# Altium PCB AD.PcbDoc
Units mm, origin at the board's own origin, x right, y up, seen from the top; angles counter-clockwise.
Board outline 105 x 72 mm, 2 copper layers (Top Layer, Bottom Layer); 130 components, 113 nets, 400 pads, 34 vias.
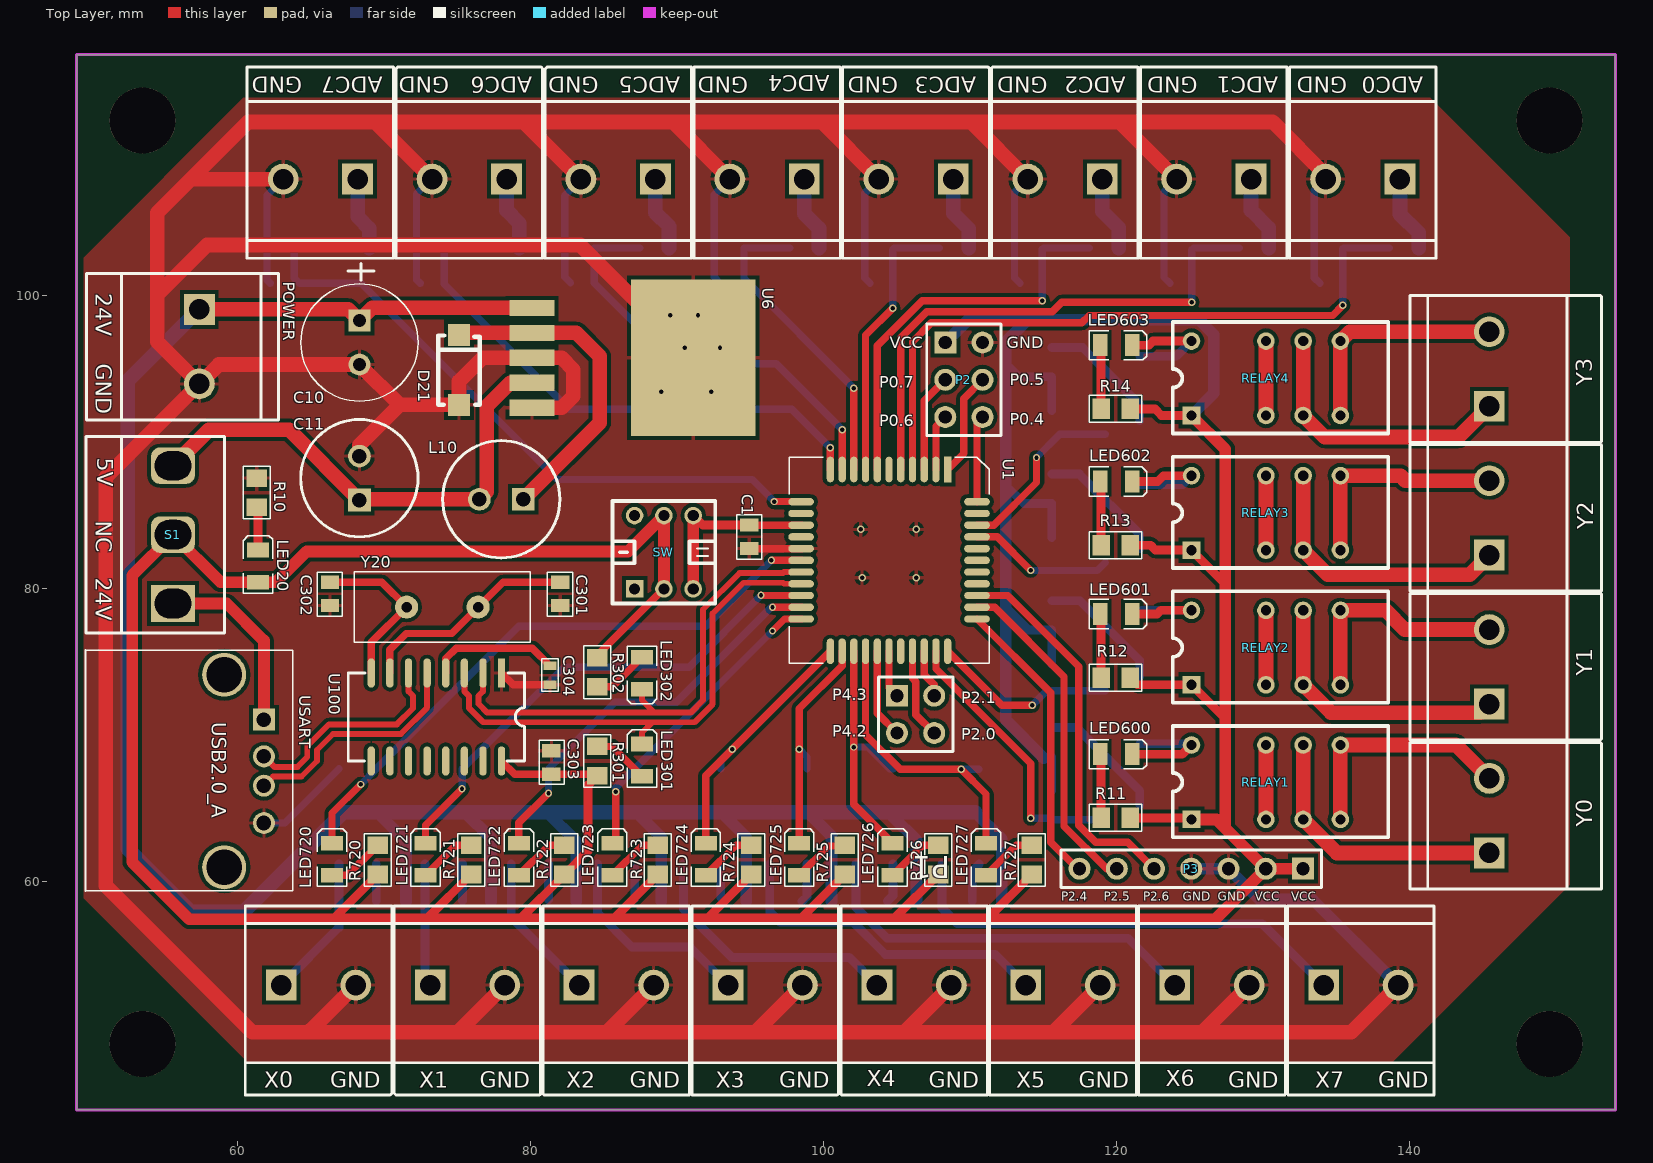
[diagram p0: Top Layer view]
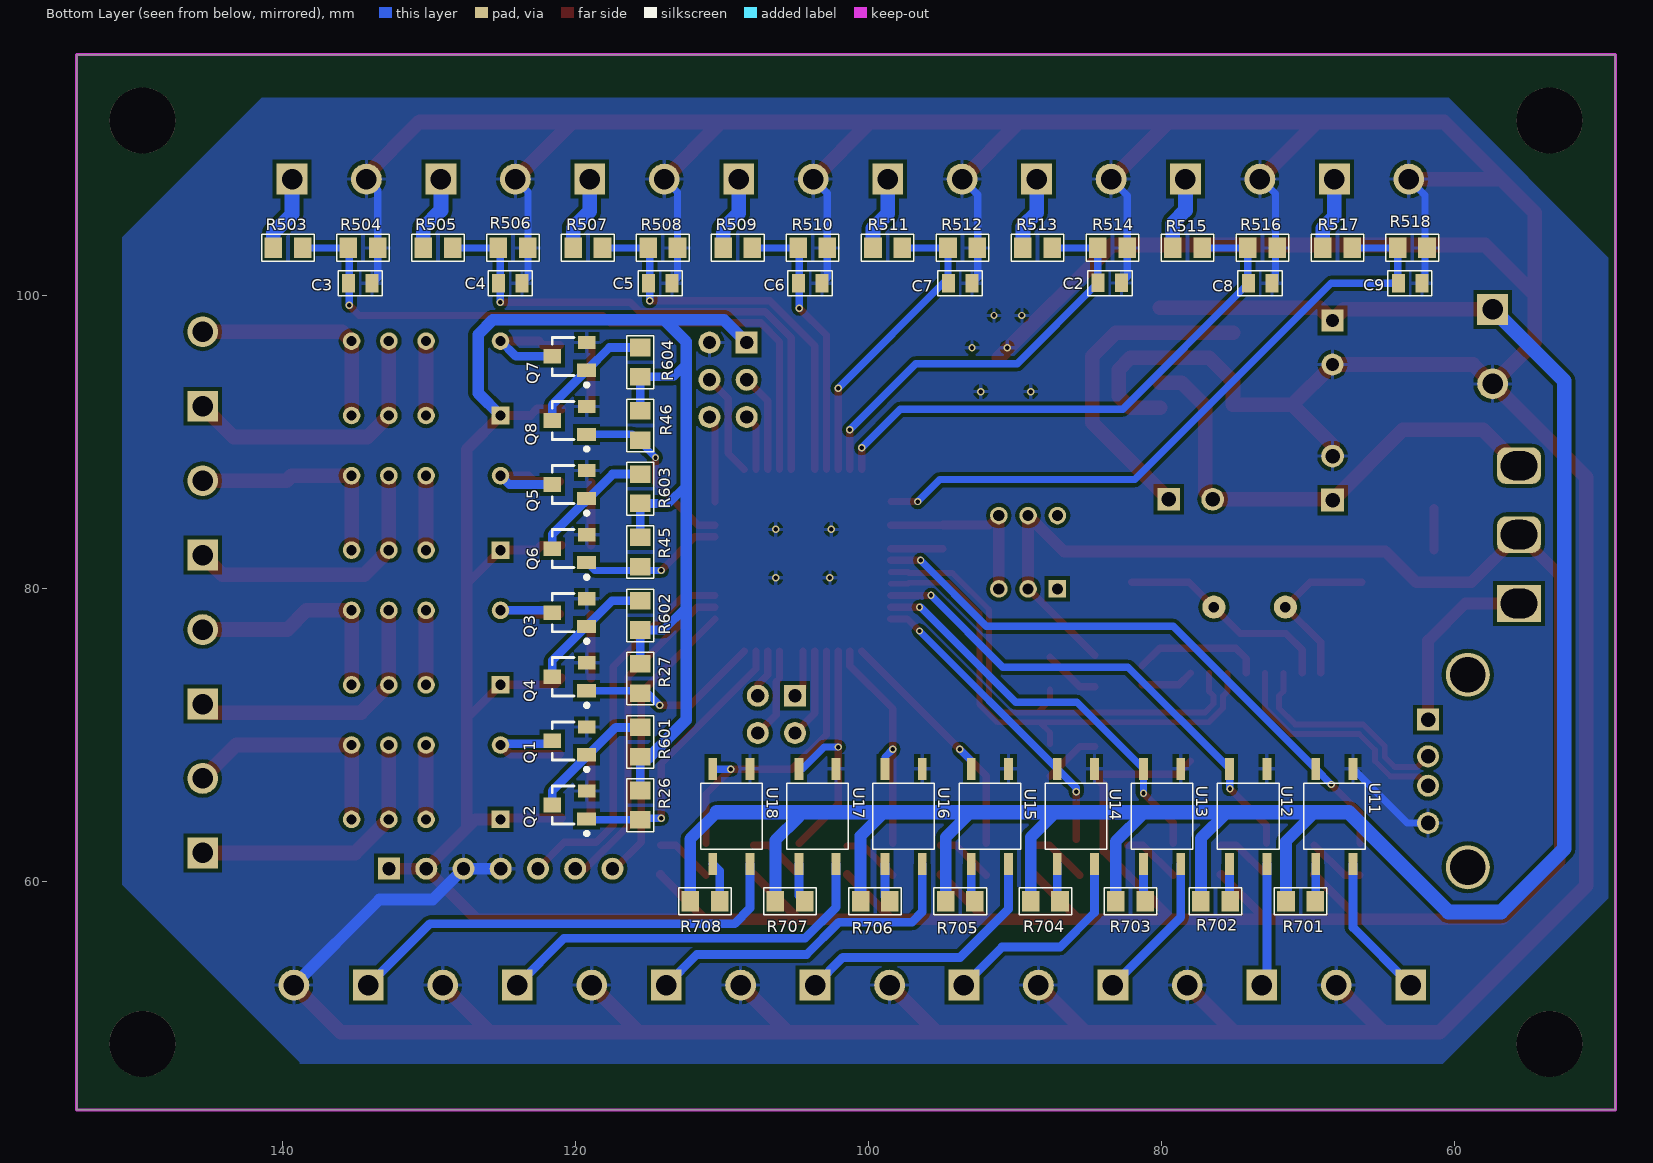
[diagram p1: Bottom Layer view, seen from below]

## Layer stack, top to bottom
Top Layer: signal copper 0.0356
Dielectric: dielectric 0.32, FR-4, Dk 4.8
Bottom Layer: signal copper 0.0356

## Board outline
49.022,116.45 49.022,44.45 154.022,44.45 154.022,116.45

## Design rules (kind name [scope] priority, off if disabled: settings)
Clearance [All] p1: gap=0.254
DiffPairsRouting DiffPair_DDiffPairsRouting [InDifferentialPair ('D')] p1: maxlimit=0.254 minlimit=0.254 mostfreqgap=0.254 maxuncoupledlength=12.7
DiffPairsRouting DiffPair_RXTXDiffPairsRouting [InDifferentialPair ('RXTX')] p2: maxlimit=0.254 minlimit=0.254 mostfreqgap=0.254 maxuncoupledlength=12.7
DiffPairsRouting [All] p3: maxlimit=0.254 minlimit=0.254 mostfreqgap=0.254 maxuncoupledlength=12.7
MatchedLengths DiffPair_DMatchedLengths [InDifferentialPair ('D')] p1: tolerance=0.1 checknetsindiffpair=TRUE checkdiffpairvsdiffpair=TRUE checkothers=TRUE
MatchedLengths DiffPair_RXTXMatchedLengths [InDifferentialPair ('RXTX')] p2: tolerance=0.1 checknetsindiffpair=TRUE checkdiffpairvsdiffpair=TRUE checkothers=TRUE
PolygonConnect [All] p1: connectstyle=Relief reliefconductorwidth=0.254 reliefentries=4 polygonreliefangle="90 Angle"
RoutingVias [All] p1: holewidth=0.711 width=1.27 viastyle="Through Hole" minholewidth=0.711 minwidth=1.27 maxholewidth=0.711 maxwidth=1.27
SilkscreenOverComponentPads [All] p1: minsilkscreentomaskgap=0.254
SolderMaskExpansion [All] p1: expansion=0.102
TestPointUsage [All] p1: valid=0 allowmultiple=FALSE
Testpoint [All] p1: side=15 testpointundercomponent=TRUE minsize=1.016 maxsize=2.54 preferedsize=1.524 minholesize=0 maxholesize=1.016 preferedholesize=0.813 testpointgrid=0.025 style=1023 order=0-112345678
Width DiffPair_DWidth [InDifferentialPair('D')] p1: maxlimit=0.4 minlimit=0.4 preferedwidth=0.4
Width DiffPair_RXTXWidth [InDifferentialPair('RXTX')] p2: maxlimit=0.4 minlimit=0.4 preferedwidth=0.4
Width [All] p3: maxlimit=0.254 minlimit=0.254 preferedwidth=0.254
22 further rules are at their usual default settings.

## Components (designator, comment, footprint, x,y, rotation, side; value= is the part's Value field where it differs from the comment)
ADC0 "ADC" CON2_1 139.319,107.95 r180 top
ADC1 "ADC" CON2_1 129.159,107.95 r180 top
ADC2 "ADC" CON2_1 118.999,107.95 r180 top
ADC3 "ADC" CON2_1 108.839,107.95 r180 top
ADC4 "ADC" CON2_1 98.679,107.95 r180 top
ADC5 "ADC" CON2_1 88.519,107.95 r180 top
ADC6 "ADC" CON2_1 78.359,107.95 r180 top
ADC7 "ADC" CON2_1 68.199,107.95 r180 top
C1 "104" C-0805 94.922,84.35 r270 top
C2 "104" C-0805 84.325,100.868 r180 bottom
C3 "104" C-0805 133.858,100.838 r0 bottom
C4 "104" C-0805 123.625,100.838 r0 bottom
C5 "104" C-0805 113.393,100.838 r0 bottom
C6 "104" C-0805 103.16,100.838 r0 bottom
C7 "104" C-0805 92.928,100.838 r0 bottom
C8 "104" C-0805 72.463,100.838 r0 bottom
C9 "104" C-0805 62.23,100.838 r0 bottom
C10 "35V/100UF" RB 68.326,98.298 r0 top
C11 "35V/1000UF" L-DIP 68.322,86.05 r180 top
C301 "22pF" C-0805 82.022,80.45 r270 top
C302 "22pF" C-0805 66.322,80.45 r270 top
C303 "10uF" C-0805 81.422,67.35 r90 top
C304 "0.01uf" C-0603 81.322,73.45 r90 top
D21 "IN5822 /SS310" DO-214AC 75.122,92.55 r90 top
L10 "100uH" L-DIP 79.502,86.106 r270 top
LED20 "LED-RED" led-0805 61.402,80.45 r90 top
LED301 "" LED-0805 87.606,67.21 r90 top
LED302 "" LED-0805 87.606,75.338 r270 top
LED600 "" LED-0805 118.864,68.712 r0 top
LED601 "" LED-0805 118.864,78.269 r0 top
LED602 "" LED-0805 118.864,87.317 r0 top
LED603 "" LED-0805 118.864,96.62 r0 top
LED720 "LED" LED-0805 66.456,60.446 r90 top
LED721 "LED" LED-0805 72.83,60.446 r90 top
LED722 "LED" LED-0805 79.205,60.446 r90 top
LED723 "LED" LED-0805 85.579,60.446 r90 top
LED724 "LED" LED-0805 91.954,60.446 r90 top
LED725 "LED" LED-0805 98.328,60.446 r90 top
LED726 "LED" LED-0805 104.702,60.446 r90 top
LED727 "LED" LED-0805 111.077,60.446 r90 top
P1 "Header 2X2" HDR2X2 105,72.7 r270 top
P2 "Header 3X2" HDR2X3 108.3,96.8 r270 top
P3 "Header 7" HDR1X7 132.7,60.9 r180 top
POWER "Power Input" CON2_1 57.404,99.06 r270 top
Q1 "2N2222" SOT23A 120.388,69.623 r90 bottom
Q2 "2N2222" SOT23A 120.388,65.251 r90 bottom
Q3 "2N2222" SOT23A 120.388,78.368 r90 bottom
Q4 "2N2222" SOT23A 120.388,73.996 r90 bottom
Q5 "2N2222" SOT23A 120.388,87.113 r90 bottom
Q6 "2N2222" SOT23A 120.388,82.741 r90 bottom
Q7 "2N2222" SOT23A 120.388,95.858 r90 bottom
Q8 "2N2222" SOT23A 120.388,91.486 r90 bottom
R10 "10K" R0805 61.322,87.55 r270 top
R11 "10K" R0805 118.924,64.362 r0 top
R12 "10K" R0805 118.924,73.919 r0 top
R13 "10K" R0805 118.924,82.967 r0 top
R14 "10K" R0805 118.924,92.27 r0 top
R26 "2K" R0805 115.562,64.235 r90 bottom
R27 "2K" R0805 115.562,72.871 r90 bottom
R45 "2K" R0805 115.562,81.507 r90 bottom
R46 "2K" R0805 115.562,90.143 r90 bottom
R301 "10K" R0805 84.558,69.242 r270 top
R302 "10K" R0805 84.558,73.306 r90 top
R503 "10K" R0805 140.589,103.251 r180 bottom
R504 "10K" R0805 135.475,103.251 r180 bottom
R505 "10K" R0805 130.361,103.251 r180 bottom
R506 "10K" R0805 125.247,103.251 r180 bottom
R507 "10K" R0805 120.134,103.251 r180 bottom
R508 "10K" R0805 115.02,103.251 r180 bottom
R509 "10K" R0805 109.906,103.251 r180 bottom
R510 "10K" R0805 104.792,103.251 r180 bottom
R511 "10K" R0805 99.678,103.251 r180 bottom
R512 "10K" R0805 94.564,103.251 r180 bottom
R513 "10K" R0805 89.45,103.251 r180 bottom
R514 "10K" R0805 84.336,103.251 r180 bottom
R515 "10K" R0805 79.223,103.251 r180 bottom
R516 "10K" R0805 74.109,103.251 r180 bottom
R517 "10K" R0805 68.995,103.251 r180 bottom
R518 "10K" R0805 63.881,103.251 r180 bottom
R601 "1K" R0805 115.562,70.543 r270 bottom
R602 "1K" R0805 115.562,77.189 r90 bottom
R603 "1K" R0805 115.562,85.825 r90 bottom
R604 "1K" R0805 115.562,94.461 r90 bottom
R701 "2K" R0805 71.501,58.674 r180 bottom
R702 "2K" R0805 77.307,58.674 r180 bottom
R703 "2K" R0805 83.112,58.674 r180 bottom
R704 "2K" R0805 88.918,58.674 r180 bottom
R705 "2K" R0805 94.724,58.674 r180 bottom
R706 "2K" R0805 100.53,58.674 r180 bottom
R707 "2K" R0805 106.335,58.674 r180 bottom
R708 "2K" R0805 112.141,58.674 r180 bottom
R720 "10K" R0805 69.563,60.506 r90 top
R721 "10K" R0805 75.938,60.506 r90 top
R722 "10K" R0805 82.312,60.506 r90 top
R723 "10K" R0805 88.686,60.506 r90 top
R724 "10K" R0805 95.061,60.506 r90 top
R725 "10K" R0805 101.435,60.506 r90 top
R726 "10K" R0805 107.81,60.506 r90 top
R727 "10K" R0805 114.184,60.506 r90 top
RELAY1 "G6S-2" G6S-2 130.175,66.802 r270 top
RELAY2 "G6S-2" G6S-2 130.175,75.988 r270 top
RELAY3 "G6S-2" G6S-2 130.175,85.175 r270 top
RELAY4 "G6S-2" G6S-2 130.175,94.361 r270 top
S1 "SW-SPDT_2" SW_1 55.604,78.994 r90 top
SW "SW" SW 85.598,78.994 r0 top
U1 "STC15F2K60S2_QFP44" PQFP44 108.458,88.138 r270 top
U6 "LM2576" LM2576 85.598,95.758 r0 top
U11 "EL357" el357 69.469,61.214 r90 bottom
U12 "EL357" EL357 75.347,61.214 r90 bottom
U13 "EL357" EL357 81.226,61.214 r90 bottom
U14 "EL357" EL357 87.104,61.214 r90 bottom
U15 "EL357" EL357 92.982,61.214 r90 bottom
U16 "EL357" EL357 98.86,61.214 r90 bottom
U17 "EL357" EL357 104.739,61.214 r90 bottom
U18 "EL357" EL357 110.617,61.214 r90 bottom
U100 "CH340G" CH340G 78.022,74.25 r270 top
USART "USB" USB2.0_A 60.452,67.564 r180 top
X0 "XH2.54" con2_1 62.992,52.959 r0 top
X1 "XH2.54" con2_1 73.152,52.959 r0 top
X2 "XH2.54" con2_1 83.312,52.959 r0 top
X3 "XH2.54" con2_1 93.472,52.959 r0 top
X4 "XH2.54" con2_1 103.632,52.959 r0 top
X5 "XH2.54" con2_1 113.792,52.959 r0 top
X6 "XH2.54" con2_1 123.952,52.959 r0 top
X7 "XH2.54" con2_1 134.112,52.959 r0 top
Y0 "Header 2" CON2_1 145.415,61.976 r90 top
Y1 "Header 2" CON2_1 145.415,72.136 r90 top
Y2 "Header 2" CON2_1 145.415,82.296 r90 top
Y3 "Header 2" CON2_1 145.415,92.456 r90 top
Y20 "12MHz" XTAL1 76.422,78.75 r180 top

## Footprints (in the part's own frame and the unit in brackets; to place one, negate y for a bottom-side part, rotate by r counter-clockwise, add the part's x,y. Pads: shape width x height; smd on the part's side, far side on the other; paste and mask are expansions set on the pad)
C-0603 [mm] "SMT 1.6*0.81*0.25"
  rect 0.6x0.9 smd: 1(0,0) 2(1.3,0)
  silkscreen extent -0.45,-0.57 1.76,0.56
C-0805 [mm] "SMT"
  rect 0.9x1.25 smd: 1(0,0) 2(1.6,0)
  silkscreen extent -0.69,-0.87 2.32,0.84
CH340G [mm]
  rect 2x0.5 smd: 1(0,0)
  oval 2x0.5 smd: 2(0,-1.27) 3(0,-2.54) 4(0,-3.81) 5(0,-5.08) 6(0,-6.35) 7(0,-7.62) 8(0,-8.89) 9(6,-8.89) 10(6,-7.62) 11(6,-6.35) 12(6,-5.08) 13(6,-3.81) 14(6,-2.54) 15(6,-1.27) 16(6,0)
  silkscreen extent 0,-10.46 6,1.57
CON2_1 [mm] "间距 5."
  rect 2.1x2.1 hole 1.4: 1(0,0)
  round 2.1 hole 1.4: 2(5.08,0)
  silkscreen extent -2.46,-5.3 7.54,5.4
con2_1 [mm] "间距 5."
  rect 2.1x2.1 hole 1.4: 1(0,0)
  round 2.1 hole 1.4: 2(5.08,0)
  silkscreen extent -2.46,-5.3 7.54,5.4
DO-214AC [mm] "SMA"
  rect 1.5x1.5 smd: 1(0,0) 2(4.75,0)
  silkscreen extent 0,-1.41 4.73,1.41
el357 [mm]
  round 0.6 on Bottom Overlay: 0(1.5,0.2)
  rect 1.5x0.6 smd: 1(0,0) 2(0,-2.54) 3(6.5,-2.54) 4(6.5,0)
  silkscreen extent 1,-3.37 5.5,0.83
EL357 [mm]
  round 0.6 on Bottom Overlay: 0(1.5,0.2)
  rect 1.5x0.6 smd: 1(0,0) 2(0,-2.54) 3(6.5,-2.54) 4(6.5,0)
  silkscreen extent 1,-3.37 5.5,0.83
G6S-2 [mm]
  round 1.2 hole 0.7: 1(-2.54,-5.08) 3(-2.54,2.54) 4(2.54,2.54) 5(-2.54,0) 6(2.54,0) 7(-2.54,5.08) 8(2.54,5.08)
  rect 1.2x1.2 hole 0.7: 2(2.54,-5.08)
  silkscreen extent -3.83,-6.35 3.77,8.35
HDR1X7 [mm] "Connector; Header; 7 Position"
  rect 1.5x1.5 hole 0.9: 1(0,0)
  round 1.5 hole 0.9: 2(2.54,0) 3(5.08,0) 4(7.62,0) 5(10.16,0) 6(12.7,0) 7(15.24,0)
  silkscreen extent -1.27,-1.27 16.51,1.27
HDR2X2 [mm] "Connector; Header; 2x2 Position"
  rect 1.5x1.5 hole 0.9: 1(0,0)
  round 1.5 hole 0.9: 2(0,2.54) 3(2.54,0) 4(2.54,2.54)
  silkscreen extent -1.27,-1.27 3.81,3.81
HDR2X3 [mm] "Connector; Header; 3x2 Position"
  rect 1.5x1.5 hole 0.9: 1(0,0)
  round 1.5 hole 0.9: 2(0,2.54) 3(2.54,0) 4(2.54,2.54) 5(5.08,0) 6(5.08,2.54)
  silkscreen extent -1.27,-1.27 6.35,3.81
L-DIP [mm] "6*8 0608"
  rect 1.55x1.55 hole 1: 1(0,0)
  round 1.55 hole 1: 2(0,-3)
  silkscreen extent -4,-5.5 4,2.5
led-0805 [mm] "SMT LED; 2 Flat Leads"
  rect 1x1.5 smd: 1(0,0) 2(2.2,0)
  silkscreen extent -0.74,-1 3.17,1
LED-0805 [mm] "SMT LED; 2 Flat Leads"
  rect 1x1.5 smd: 1(0,0) 2(2.2,0)
  silkscreen extent -0.74,-1 3.17,1
LM2576 [mm]
  rect 3.1x1.1 smd: 1(-5.5,3.404) 2(-5.5,1.702) 3(-5.5,0) 4(-5.5,-1.702) 5(-5.5,-3.404)
  rect 8.5x10.7 smd: 6(5.5,0)
PQFP44 [mm]
  rect 1.75x0.5 smd: 1(0,0)
  oval 1.75x0.5 smd: 2(0,-0.8) 3(0,-1.6) 4(0,-2.4) 5(0,-3.2) 6(0,-4) 7(0,-4.8) 8(0,-5.6) 9(0,-6.4) 10(0,-7.2) 11(0,-8) 23(12.4,-8) 24(12.4,-7.2) 25(12.4,-6.4) 26(12.4,-5.6) 27(12.4,-4.8) 28(12.4,-4) 29(12.4,-3.2) 30(12.4,-2.4) 31(12.4,-1.6) 32(12.4,-0.8) 33(12.4,0)
  oval 0.5x1.75 smd: 12(2.2,-10) 13(3,-10) 14(3.8,-10) 15(4.6,-10) 16(5.4,-10) 17(6.2,-10) 18(7,-10) 19(7.8,-10) 20(8.6,-10) 21(9.4,-10) 22(10.2,-10) 34(10.2,2) 35(9.4,2) 36(8.6,2) 37(7.8,2) 38(7,2) 39(6.2,2) 40(5.4,2) 41(4.6,2) 42(3.8,2) 43(3,2) 44(2.2,2)
  silkscreen extent -0.82,-10.83 13.23,2.83
R0805 [mm]
  rect 1.2x1.4 smd: 1(0,0) 2(2,0)
  silkscreen extent -0.8,-0.92 2.79,0.92
RB [mm] "6mm*8mm"
  rect 1.5x1.5 hole 0.9: 1(0,0)
  round 1.5 hole 0.9: 2(0,-3)
  silkscreen extent -4,-5.5 4,3.89
SOT23A [mm] "SOT-23; 3 Leads; Body 3.0 x 2.5 mm, inc. leads (LxW max)"
  rect 0.9x1.3 smd: 1(-0.95,-1.175)
  rect 0.9x1.2 smd: 2(0.95,-1.175)
  rect 1x1.2 smd: 3(0,1.175)
  silkscreen extent -2.07,-1.3 1.3,1.18
SW [mm] "Hole size 0.75,  间距x:2mm ,y:5mm"
  rect 1.2x1.2 hole 0.75: 1(1.5,1)
  round 1.2 hole 0.762: 2(3.5,1) 3(5.5,1) 4(1.5,6) 5(3.5,6) 6(5.5,6)
  silkscreen extent 0,0 7,7
SW_1 [mm] "ҡͷ"
  rect 2.5x3 hole 2 slot 2.5 at 90 deg: 1(0,0)
  rrect50% 2.5x3 hole 2 slot 2.5 at 90 deg: 2(4.7,0) 3(9.4,0)
  silkscreen extent -2,-3.5 11.4,3.5
USB2.0_A [mm] "USB2.0 ĸ?"
  rect 1.5x1.5 hole 1: 1(-1.355,-3.5)
  round 1.5 hole 1: 2(-1.355,-1) 3(-1.355,1) 4(-1.355,3.55)
  round 3 hole 2.4: NC(1.355,6.57) NC(1.355,-6.57)
  silkscreen extent -3.33,-8.25 10.81,8.18
XTAL1 [mil]
  round 62 hole 28: 1(0,0) 2(192.13,0)
  silkscreen extent -140,-94 332,94

## Part data
ADC0 ADC1 ADC2 ADC3 ADC4 ADC5 ADC6 ADC7 X0 X1 X2 X3 X4 X5 X6 X7: library part "Header 2", "Header, 2-Pin"
C1 C2 C3 C4 C5 C6 C7 C8 C9 C301 C302 C303 C304: library part CAP1
C10 C11: library part CAP2
D21: library part "DIODE SCHOTTKY", "Schottky Diode"
L10: library part Inductor, "Inductor"
LED20: library part LED0, "Typical INFRARED GaAs LED"
LED301 LED302 LED600 LED601 LED602 LED603: library part LED
P1: "Header, 2-Pin, Dual row"
P2: "Header, 3-Pin, Dual row"
P3: "Header, 7-Pin"
POWER: library part CON2
Q1 Q2 Q3 Q4 Q5 Q6 Q7 Q8: library part NPN_S8050, "NPN Transistor"
R10: library part "Res Semi", "Semiconductor Resistor"
R11 R12 R13 R14 R26 R27 R45 R46 R503 R504 R505 R506 R507 R508 R509 R510 R511 R512 R513 R514 R515 R516 R517 R518 R601 R602 R603 R604 R701 R702 R703 R704 R705 R706 R707 R708 R720 R721 R722 R723 R724 R725 R726 R727: library part RES
R301 R302: library part Res3, "Resistor"
RELAY1 RELAY2 RELAY3 RELAY4: library part RELAY-G6S-2
S1: "SPDT Subminiature Toggle Switch, Right Angle Mounting, Vertical Actuation"
U11 U12 U13 U14 U15 U16 U17 U18: library part Optoisolator, "4-Pin Phototransistor Optocoupler"
USART: library part "Header 4", "Header, 4-Pin"
Y0 Y1 Y2 Y3: "Header, 2-Pin"
Y20: library part CRYSTAL, "Crystal"

## Free pads (board coordinates)
  round 4.5 hole 4.5: 0(53.522,48.95) 1(149.522,48.95) 2(149.522,111.95) 3(53.522,111.95)

## Via types
v1: diameter 0.5, hole 0.3, Top Layer to Bottom Layer, 34 vias

## Nets (pads, with @x,y where several pads share a name; then routed paths per layer and width w, separated by ;. In a path a pad name is that pad's centre, name@x,y a point inside that pad or via, vN(x,y) a via of type N, cw(c..) or ccw(c..) an arc to the next point about the centre after c; other vN are vias at no path point)
ADC0: C3.2 R503.2 R504.1 U1.4 | length 46.1
  Top Layer w0.5: U1.4 106.058,96.858 107.342,98.142 117.614,98.142 118.122,98.65 134.722,98.65 v1(135.422,99.35)
  Bottom Layer w0.5: v1(135.422,99.35) R504.1@135.422,103.198 ; R504.1 R503.2
ADC1: C4.2 R505.2 R506.1 U1.5 | length 36.5
  Top Layer w0.5: U1.5 105.258,97.124 107.03,98.896 115.596,98.896 116.25,99.55 v1(125.122,99.55)
  Bottom Layer w0.5: v1(125.122,99.55) R506.1@125.122,103.126 ; R506.1 R505.2
ADC2: C5.2 R507.2 R508.1 U1.7 | length 27.7
  Top Layer w0.254: U1.7@103.622,88.174 U1.7
  Top Layer w0.5: U1.7 103.658,96.591 106.717,99.65 v1(114.922,99.65)
  Bottom Layer w0.5: v1(114.922,99.65) R508.1@114.922,103.153 ; R508.1 R507.2
ADC3: C6.2 R509.2 R510.1 U1.8 | length 18.9
  Top Layer w0.5: U1.8 102.858,97.286 v1(104.722,99.15)
  Bottom Layer w0.5: v1(104.722,99.15) R510.1@104.722,103.15 ; R510.1 R509.2
ADC4: C7.2 R511.2 R512.1 U1.9 | length 21.3
  Top Layer w0.5: U1.9 v1(102.058,93.686)
  Bottom Layer w0.5: R511.2 R512.1 94.564,101.18 v1(102.058,93.686)
ADC5: C2.1 R513.2 R514.1 U1.10 | length 29.3
  Top Layer w0.5: U1.10 v1(101.258,90.85)
  Bottom Layer w0.5: R513.2 R514.1 84.336,100.857 89.843,95.35 96.758,95.35 v1(101.258,90.85)
ADC6: C8.2 R515.2 R516.1 U1.11 | length 38
  Top Layer w0.5: U1.11 v1(100.458,89.614)
  Bottom Layer w0.5: R515.2 R516.1 74.109,100.792 82.651,92.25 97.822,92.25 v1(100.458,89.614)
ADC7: C9.2 R517.2 R518.1 U1.12 | length 46.1
  Top Layer w0.254: U1.12@98.446,85.95 U1.12
  Top Layer w0.5: v1(96.622,85.95) U1.12@98.446,85.95
  Bottom Layer w0.5: R517.2 R518.1 63.881,101.191 64.234,100.838 68.434,100.838 81.822,87.45 95.122,87.45 v1(96.622,85.95)
COM1: RELAY1.3 RELAY1.4 Y0.1 | length 18.7
  Top Layer w1: RELAY1.3 RELAY1.4 135.001,61.976 Y0.1
COM2: RELAY2.3 RELAY2.4 Y1.1 | length 18.8
  Top Layer w1: RELAY2.3 RELAY2.4 134.613,71.55 144.829,71.55 Y1.1
COM3: RELAY3.3 RELAY3.4 Y2.1 | length 19
  Top Layer w1: RELAY3.3 RELAY3.4 134.4,80.95 144.069,80.95 Y2.1
COM4: RELAY4.3 RELAY4.4 Y3.1 | length 19.3
  Top Layer w1: RELAY4.3 RELAY4.4 134.186,90.35 143.309,90.35 Y3.1
D_N: U100.5 USART.3 | length 16.1
  Top Layer w0.4: USART.3 62.439,67.196 64.368,67.196 65.422,68.25 65.422,68.996 66.522,70.096 71.151,70.096 72.942,71.887 U100.5
D_P: U100.6 USART.2 | length 15.1
  Top Layer w0.4: USART.2 62.521,67.85 64.097,67.85 64.768,68.521 64.768,69.267 66.251,70.75 70.88,70.75 71.98,71.85 71.98,72.692 71.672,73 U100.6
GND: ADC0.2 ADC1.2 ADC2.2 ADC3.2 ADC4.2 ADC5.2 ADC6.2 ADC7.2 C1.2 C2.2 C3.1 C4.1 C5.1 C6.1 C7.1 C8.1 C9.1 C10.2 C11.2 C301.2 C302.2 C303.2 C304.1 D21.1 P2.2 P3.3 P3.4 POWER.2 Q1.2 Q2.2 Q3.2 Q4.2 Q5.2 Q6.2 Q7.2 Q8.2 R10.1 R504.2 R506.2 R508.2 R510.2 R512.2 R514.2 R516.2 R518.2 U1.16 U6.3 U6.5 U6.6 U11.3 U12.3 U13.3 U14.3 U15.3 U16.3 U17.3 U18.3 U100.1 USART.4 X0.2 X1.2 X2.2 X3.2 X4.2 X5.2 X6.2 X7.2 | length 470.6
  Top Layer w0.254: U6.3@80.022,95.834 U6.3
  Top Layer w0.5: U100.1 78.822,73.45 C304.1 ; C1.2@94.922,82.738 U1.16
  Top Layer w1: 56.922,107.95 ADC7.2 ; 65.022,49.909 X0.2 ; C11.2 68.322,89.798 71.074,92.55 ; 69.422,111.807 ADC6.2 ; X1.2 75.023,49.75 ; 79.722,111.667 ADC5.2 ; U6.5 82.126,92.354 82.922,93.15 82.922,94.95 82.114,95.758 U6.3 76.73,95.758 75.122,94.15 D21.1 71.074,92.55 ; 85.222,49.789 X2.2 ; U6.6 83.406,103.45 57.922,103.45 54.522,100.05 ; ADC4.2 89.699,111.85 ; X3.2 95.343,49.75 ; ADC3.2 99.859,111.85 ; X4.2 105.503,49.75 ; 110.022,111.847 ADC2.2 ; X5.2 115.663,49.75 ; 120.422,111.607 ADC1.2 ; X6.2 125.823,49.75 ; ADC0.2@134.322,108.15 130.622,111.85 99.859,111.85 ; X7.2 135.983,49.75 125.823,49.75 ; 54.522,100.05 54.522,105.65 60.722,111.85 89.699,111.85 ; 54.522,100.05 54.522,96.862 POWER.2 ; POWER.2 51.022,87.598 51.022,59.75 61.022,49.75 75.023,49.75 ; POWER.2 58.722,95.298 C10.2 71.074,92.55 ; 75.023,49.75 95.343,49.75 ; 89.699,111.85 99.859,111.85 ; 95.343,49.75 105.503,49.75 ; 105.503,49.75 115.663,49.75 ; 115.663,49.75 125.823,49.75
  Bottom Layer w0.5: USART.4 63.229,64.014 U11.3 ; C9.1 62.022,101.046 62.022,106.853 ADC7.2 ; C8.1 72.222,101.079 72.222,106.95 ADC6.2@73.25,107.978 ; C2.2 82.322,101.271 82.322,106.833 ADC5.2 ; C7.1 92.522,101.244 92.522,106.873 ADC4.2 ; C6.1 102.792,101.206 102.792,106.983 ADC3.2 ; C5.1 113.022,101.209 113.022,107.053 ADC2.2 ; C4.1 123.222,101.241 123.222,107.093 ADC1.2 ; C3.1 133.475,101.221 R504.2 133.475,107.186 ADC0.2
  Bottom Layer w0.8: P3.4 P3.3 129.72,58.8 133.351,58.8 X7.2
  other v1: 102.622,80.75 106.322,80.75 102.522,84.05 106.322,84.05 88.922,93.45 92.322,93.45 90.522,96.45 92.922,96.45 89.522,98.65 91.422,98.65
MCUVCC: C1.1 SW.3 SW.6 U1.14 | length 12.6
  Top Layer w0.5: C1.1@94.922,84.338 U1.14
  Top Layer w0.6: SW.6 91.742,84.35 C1.1
  Top Layer w0.8: SW.3 SW.6
NC1: RELAY1.5 RELAY1.6 | length 5.1
  Top Layer w1: RELAY1.6 RELAY1.5
NC2: RELAY2.5 RELAY2.6 | length 5.1
  Top Layer w1: RELAY2.6 RELAY2.5
NC3: RELAY3.5 RELAY3.6 | length 5.1
  Top Layer w1: RELAY3.6 RELAY3.5
NC4: RELAY4.5 RELAY4.6 | length 5.1
  Top Layer w1: RELAY4.6 RELAY4.5
NetADC0_1: ADC0.1 R503.1 | length 5.2
  Bottom Layer w1: ADC0.1 139.319,105.553 140.589,104.283 R503.1
NetADC1_1: ADC1.1 R505.1 | length 5.2
  Bottom Layer w1: ADC1.1 129.159,105.813 130.361,104.611 R505.1
NetADC2_1: ADC2.1 R507.1 | length 5.2
  Bottom Layer w1: ADC2.1 118.999,105.773 120.134,104.638 R507.1
NetADC3_1: ADC3.1 R509.1 | length 5.1
  Bottom Layer w1: ADC3.1 108.839,105.633 109.906,104.566 R509.1
NetADC4_1: ADC4.1 R511.1 | length 5.1
  Bottom Layer w1: ADC4.1 98.679,105.593 99.678,104.594 R511.1
NetADC5_1: ADC5.1 R513.1 | length 5.1
  Bottom Layer w1: ADC5.1 88.519,105.653 89.45,104.722 R513.1
NetADC6_1: ADC6.1 R515.1 | length 5.1
  Bottom Layer w1: ADC6.1 78.359,105.813 79.223,104.949 R515.1
NetADC7_1: ADC7.1 R517.1 | length 5
  Bottom Layer w1: ADC7.1 68.199,105.373 68.995,104.577 R517.1
NetC301_1: C301.1 U100.7 Y20.1 | length 15.9
  Top Layer w0.5: U100.7@70.402,75.03 U100.7 70.402,75.83 71.522,76.95 74.622,76.95 Y20.1 78.122,80.45 C301.1
NetC302_1: C302.1 U100.8 Y20.2 | length 11.4
  Top Layer w0.5: C302.1 69.842,80.45 Y20.2 69.132,76.34 U100.8
NetC304_2: C304.2 U100.4 | length 8.9
  Top Layer w0.5: U100.4 74.212,75.24 74.922,75.95 80.122,75.95 C304.2
NetD21_2: D21.2 L10.1 U6.2 | length 22.2
  Top Layer w1: D21.2@75.122,97.46 U6.2 83.112,97.46 84.722,95.85 84.722,91.326 L10.1
NetLED20_2: LED20.2 R10.2 | length 2.8
  Top Layer w0.6: LED20.2 R10.2@61.402,85.47
NetLED301_1: LED301.1 R301.1 | length 3.9
  Top Layer w0.5: R301.1 85.574,69.242 LED301.1
NetLED302_1: LED302.1 R302.1 | length 3.9
  Top Layer w0.5: R302.1 85.574,73.306 LED302.1
NetLED600_1: LED600.1 R11.1 | length 4.3
  Top Layer w0.6: R11.1 LED600.1@118.924,68.652
NetLED600_2: LED600.2 Q1.3 RELAY1.1 | length 7.8
  Top Layer w0.6: LED600.2 124.465,68.712 RELAY1.1
  Bottom Layer w0.6: Q1.3@121.563,69.423 RELAY1.1@125.095,69.423
NetLED601_1: LED601.1 R12.1 | length 4.3
  Top Layer w0.6: R12.1 LED601.1@118.924,78.209
NetLED601_2: LED601.2 Q3.3 RELAY2.1 | length 7.5
  Top Layer w0.6: LED601.2 122.741,78.269 123,78.528 RELAY2.1
  Bottom Layer w0.6: Q3.3@121.723,78.528 RELAY2.1
NetLED602_1: LED602.1 R13.1 | length 4.3
  Top Layer w0.6: R13.1 LED602.1@118.924,87.257
NetLED602_2: LED602.2 Q5.3 RELAY3.1 | length 8
  Top Layer w0.6: LED602.2 122.789,87.317 123.187,87.715 RELAY3.1
  Bottom Layer w0.6: Q5.3 124.493,87.113 RELAY3.1
NetLED603_1: LED603.1 R14.1 | length 4.3
  Top Layer w0.6: R14.1 LED603.1@118.924,96.56
NetLED603_2: LED603.2 Q7.3 RELAY4.1 | length 8.1
  Top Layer w0.6: LED603.2 122.192,96.62 122.473,96.901 RELAY4.1
  Bottom Layer w0.6: Q7.3 124.052,95.858 RELAY4.1
NetLED720_1: LED720.1 R720.2 | length 4
  Top Layer w0.5: LED720.1 67.503,60.446 R720.2
NetLED721_1: LED721.1 R721.2 | length 4
  Top Layer w0.5: LED721.1 74.89,62.506 R721.2
NetLED722_1: LED722.1 R722.2 | length 4
  Top Layer w0.5: LED722.1 81.265,62.506 R722.2
NetLED723_1: LED723.1 R723.2 | length 4
  Top Layer w0.5: LED723.1 87.639,62.506 R723.2
NetLED724_1: LED724.1 R724.2 | length 4
  Top Layer w0.5: LED724.1 94.014,62.506 R724.2
NetLED725_1: LED725.1 R725.2 | length 3.9
  Top Layer w0.5: LED725.1 100.332,62.45 R725.2@101.435,62.45
NetLED726_1: LED726.1 R726.2 | length 4
  Top Layer w0.5: LED726.1 106.762,62.506 R726.2
NetLED727_1: LED727.1 R727.2 | length 4
  Top Layer w0.5: LED727.1 113.137,62.506 R727.2
NetQ1_1: Q1.1 Q2.3 R601.1 | length 8.8
  Bottom Layer w0.6: R601.1 117.229,70.543 121.563,66.209 Q2.3
NetQ3_1: Q3.1 Q4.3 R602.2 | length 8.8
  Bottom Layer w0.6: R602.2 117.483,79.189 121.563,75.109 Q4.3
NetQ5_1: Q5.1 Q6.3 R603.2 | length 8.7
  Bottom Layer w0.6: R603.2 117.447,87.825 121.563,83.709 Q6.3
NetQ7_1: Q7.1 Q8.3 R604.2 | length 8.7
  Bottom Layer w0.6: R604.2 117.66,96.461 Q7.1 121.563,92.558 Q8.3
NetR701_2: R701.2 U11.1 | length 2.5
  Bottom Layer w0.6: R701.2@69.469,58.706 U11.1
NetR702_2: R702.2 U12.1 | length 2.5
  Bottom Layer w0.6: R702.2@75.347,58.715 U12.1
NetR703_2: R703.2 U13.1 | length 2.4
  Bottom Layer w0.6: R703.2@81.226,58.787 U13.1
NetR704_2: R704.2 U14.1 | length 2.4
  Bottom Layer w0.6: R704.2@87.104,58.86 U14.1
NetR705_2: R705.2 U15.1 | length 2.3
  Bottom Layer w0.6: R705.2@92.982,58.932 U15.1
NetR706_2: R706.2 U16.1 | length 2.7
  Bottom Layer w0.6: R706.2 98.86,59.005 U16.1
NetR707_2: R707.2 U17.1 | length 2.7
  Bottom Layer w0.6: R707.2 104.739,59.077 U17.1
NetR708_2: R708.2 U18.1 | length 2.7
  Bottom Layer w0.6: R708.2 110.141,60.738 U18.1
NO1: RELAY1.7 RELAY1.8 Y0.2 | length 16.2
  Top Layer w1: RELAY1.8 RELAY1.7 143.129,69.342 Y0.2
NO2: RELAY2.7 RELAY2.8 Y1.2 | length 15.8
  Top Layer w1: RELAY2.8 RELAY2.7 138.344,78.528 139.656,77.216 Y1.2
NO3: RELAY3.7 RELAY3.8 Y2.2 | length 15.4
  Top Layer w1: RELAY3.8 RELAY3.7 139.357,87.715 139.696,87.376 Y2.2
NO4: RELAY4.7 RELAY4.8 Y3.2 | length 15.5
  Top Layer w1: RELAY4.8 RELAY4.7 135.89,97.536 Y3.2
P0.0: U1.40
P0.1: Q6.1 R45.1 U1.41 | length 9.9
  Top Layer w0.5: U1.41 111.834,83.538 v1(114.122,81.25)
  Bottom Layer w0.5: v1(114.122,81.25) 118.672,81.25 Q6.1
P0.2: Q8.1 R46.1 U1.42 | length 12.3
  Top Layer w0.5: U1.42 111.61,84.338 114.522,87.25 v1(114.522,88.95)
  Bottom Layer w0.5: v1(114.522,88.95) 116.108,90.536 Q8.1
P0.3: U1.43
P0.4: P2.6 U1.44 | length 5.9
  Top Layer w0.5: U1.44 110.458,91.338 P2.6
P0.5: P2.4 U1.1 | length 7.1
  Top Layer w0.5: U1.1 109.554,89.234 109.554,92.974 P2.4
P0.6: P2.5 U1.2 | length 3.8
  Top Layer w0.5: U1.2 107.658,91.078 P2.5
P0.7: P2.3 U1.3 | length 6.7
  Top Layer w0.5: U1.3 106.858,92.818 P2.3
P2.0: P1.4 U1.30 | length 6.2
  Top Layer w0.5: U1.30 106.058,73.876 106.286,73.648 106.286,71.414 P1.4
P2.1: P1.2 U1.31 | length 3.3
  Top Layer w0.5: U1.31 106.858,74.142 107.54,73.46 P1.2
P2.2: Q2.1 R26.1 U1.32 | length 19
  Top Layer w0.5: U1.32 107.658,74.542 114.122,68.078 v1(114.122,64.35)
  Bottom Layer w0.5: v1(114.122,64.35) R26.1@115.447,64.35 ; R26.1 Q2.1@119.213,64.235
P2.3: Q4.1 R27.1 U1.33 | length 12.7
  Top Layer w0.5: U1.33 112.146,72.05 v1(114.222,72.05)
  Bottom Layer w0.5: v1(114.222,72.05) 115.218,73.046 Q4.1
P2.4: P3.7 U1.34 | length 20
  Top Layer w0.5: U1.34 110.462,77.938 115.5,72.9 115.5,62.7 P3.7@117.38,60.82
P2.5: P3.6 U1.35 | length 22.9
  Top Layer w0.5: U1.35 111.662,78.738 116.4,74 116.4,63.807 119.307,60.9 P3.6
P2.6: P3.5 U1.36 | length 26.1
  Top Layer w0.5: U1.36 112.562,79.538 117.4,74.7 117.4,63.873 118.573,62.7 120.74,62.7 P3.5
P2.7: U1.37
P3.2: LED721.2 U1.20 U12.4 | length 34
  Top Layer w0.5: LED721.2 72.83,63.858 v1(75.322,66.35) ; v1(95.722,79.55) 95.734,79.538 U1.20
  Bottom Layer w0.5: v1@75.347,66.375 U12.4 82.283,74.65 90.722,74.65 ; 90.822,74.65 v1(95.722,79.55)
P3.3: LED722.2 U1.21 U13.4 | length 27.7
  Top Layer w0.254: U1.21@98.446,78.75 U1.21
  Top Layer w0.5: LED722.2 79.205,64.033 v1(81.226,66.054) ; v1(96.51,78.738) U1.21
  Bottom Layer w0.254: v1@96.418,78.738 v1(96.51,78.738)
  Bottom Layer w0.5: v1(81.226,66.054) U13.4 85.762,72.25 89.93,72.25 v1@96.418,78.738
P3.4: LED723.2 U1.22 U14.4 | length 20.9
  Top Layer w0.5: LED723.2@85.822,62.889 v1(85.822,66.15) ; v1(96.51,77.12) 97.328,77.938 U1.22
  Bottom Layer w0.5: v1(85.822,66.15) 85.822,66.432 U14.4 v1(96.51,77.12)
P3.5: LED724.2 U1.23 U15.4 | length 18.3
  Top Layer w0.5: LED724.2 91.954,67.234 v1(93.769,69.049) U1.23
  Bottom Layer w0.5: U15.4 92.982,68.262 v1(93.769,69.049)
P3.6: LED725.2 U1.24 U16.4 | length 15.9
  Top Layer w0.5: LED725.2 v1(98.328,69.05) 98.328,71.828 101.258,74.758 U1.24
  Bottom Layer w0.5: v1(98.328,69.05) 98.86,68.518 U16.4
P3.7: LED726.2 U1.25 U17.4 | length 17.5
  Top Layer w0.5: U1.25 102.058,69.75 102.058,65.29 LED726.2
  Bottom Layer w0.5: v1(102.058,69.2) 103,69.2 104.486,67.714 U17.4
P4.0: LED720.2 U1.17 U11.4 | length 41.2
  Top Layer w0.254: U1.17@98.446,81.95 U1.17
  Top Layer w0.5: LED720.2 66.456,64.701 v1(68.405,66.65) ; v1(96.434,81.938) U1.17
  Bottom Layer w0.5: v1(68.405,66.65) U11.4 79.205,77.45 91.946,77.45 v1(96.434,81.938)
P4.1: LED727.2 U1.26 U18.4 | length 20.1
  Top Layer w0.5: U1.26 102.858,70.042 105.215,67.685 v1(109.387,67.685) 111.077,65.995 LED727.2
  Bottom Layer w0.5: v1(109.387,67.685) U18.4@110.588,67.685
P4.2: P1.3 U1.27 | length 6.1
  Top Layer w0.5: U1.27 103.658,71.502 P1.3
P4.3: P1.1 U1.28 | length 3.3
  Top Layer w0.5: U1.28 104.458,73.242 P1.1
P4.4: U1.29
P4.5: U1.38
P4.6: U1.39
P4.7: U1.6
P5.4: U1.13
P5.5: U1.15
POWER_OUT: C10.1 POWER.1 R701.1 R702.1 R703.1 R704.1 R705.1 R706.1 R707.1 R708.1 U6.1 | length 178.5
  Top Layer w1: POWER.1 67.564,99.06 C10.1 69.19,99.162 U6.1
  Bottom Layer w0.8: 69.522,64.75 71.501,62.771 R701.1 ; 75.522,64.75 77.307,62.965 R702.1 ; 81.122,64.75 83.112,62.76 R703.1 ; 87.222,64.75 88.918,63.054 R704.1 ; 93.022,64.75 94.724,63.048 R705.1 ; 99.122,64.55 100.53,63.142 R706.1 ; 104.722,64.45 106.335,62.837 R707.1 ; 110.322,64.75 112.141,62.931 R708.1
  Bottom Layer w1: POWER.1 52.522,94.178 52.522,62.25 56.822,57.95 60.422,57.95 67.222,64.75 70.422,64.75 110.322,64.75
PVCC: C11.1 L10.2 S1.3 U6.4 | length 34.2
  Top Layer w1: S1.3 58.06,90.85 63.522,90.85 C11.1 ; C11.1@68.322,86.106 L10.2 77.022,86.626 77.022,92.45 78.628,94.056 U6.4
RXD1: LED302.2 U1.18 U100.2 | length 34
  Top Layer w0.4: U100.2 76.752,73 76.444,72.692 76.444,72.15 77.044,71.55 88.456,71.55 ; LED302.2 87.606,72.4 88.456,71.55 ; U1.18 97.3,81.138 97.227,81.065 94.251,81.065 91.768,78.582 91.768,72.396 90.922,71.55 88.456,71.55
TXD1: LED301.2 U1.19 U100.3 | length 34.9
  Top Layer w0.4: U100.3 75.482,73 75.79,72.692 75.79,71.879 76.773,70.896 88.302,70.896 ; LED301.2 87.606,70.2 88.302,70.896 ; U1.19 97.3,80.338 97.227,80.411 94.522,80.411 92.422,78.311 92.422,72.125 91.193,70.896 88.302,70.896
USB5V: S1.1 USART.1 | length 12.7
  Top Layer w0.8: S1.1 59.278,78.994 61.807,76.465 USART.1
VCC: C303.1 LED20.1 P2.1 P3.1 P3.2 R11.2 R12.2 R13.2 R14.2 R26.2 R27.2 R45.2 R46.2 R301.2 R302.2 R601.2 R602.1 R603.1 R604.1 R720.1 R721.1 R722.1 R723.1 R724.1 R725.1 R726.1 R727.1 RELAY1.2 RELAY2.2 RELAY3.2 RELAY4.2 S1.2 SW.2 SW.5 U100.16 | length 339.4
  Top Layer w0.254: RELAY4.2@124.646,92.27 RELAY4.2
  Top Layer w0.5: U100.16 78.922,67.35 C303.1 R301.2@84.45,67.35 ; R302.2@84.558,75.454 SW.2
  Top Layer w0.6: 66.622,57.565 R720.1 ; 73.022,57.59 R721.1 ; 79.256,57.45 R722.1 83.922,62.116 83.922,66.606 R301.2 ; 85.63,57.45 R723.1 ; 92.122,57.567 R724.1 ; 98.422,57.493 R725.1 ; 104.922,57.618 R726.1 ; 111.222,57.544 R727.1 ; R11.2 RELAY1.2@124.995,64.362 ; R12.2 121.394,73.448 RELAY2.2 127.193,71.35 ; R13.2 122.305,82.967 122.637,82.635 RELAY3.2 127.18,80.55 ; R14.2 122.602,92.27 123.051,91.821 RELAY4.2
  Top Layer w0.8: SW.2 SW.5 86.654,82.55 64.722,82.55 62.622,80.45 LED20.1 58.848,80.45 S1.2 52.822,80.912 52.822,61.35 56.722,57.45 79.256,57.45 85.63,57.45 126.71,57.45 P3.2 ; RELAY1.2 126.798,64.262 127.546,63.514 ; RELAY4.2 127.4,89.516 127.4,63.66 P3.2 ; P3.1 P3.2
  Bottom Layer w0.6: 112.422,78.75 113.983,77.189 R602.1 R27.2 ; 112.422,87.05 113.647,85.825 R603.1 R45.2 ; 112.422,95.35 113.311,94.461 R604.1 R46.2 ; R26.2 R601.2
  Bottom Layer w0.8: P2.1 109.85,98.35 113.922,98.35 ; R601.2@115.022,68.45 112.422,71.05 112.422,78.75 112.422,87.05 112.422,95.35 112.422,96.85 113.922,98.35 ; RELAY4.2 126.622,93.348 126.622,97.35 125.622,98.35 113.922,98.35
X0: U11.2 X0.1 | length 9.9
  Bottom Layer w0.6: X0.1 66.929,56.896 U11.2
X1: U12.2 X1.1 | length 7.9
  Bottom Layer w0.6: X1.1@72.807,53.304 U12.2
X2: U13.2 X2.1 | length 10.2
  Bottom Layer w0.6: U13.2 78.686,57.585 X2.1
X3: U14.2 X3.1 | length 14.3
  Bottom Layer w0.6: U14.2 84.564,57.908 86.922,55.55 90.881,55.55 X3.1
X4: U15.2 X4.1 | length 18.4
  Bottom Layer w0.6: U15.2 90.442,58.13 93.722,54.85 101.741,54.85 X4.1
X5: U16.2 X5.1 | length 22.8
  Bottom Layer w0.6: U16.2 96.32,57.952 97.022,57.25 102.014,57.25 104.214,55.05 111.701,55.05 X5.1
X6: U17.2 X6.1 | length 26.9
  Bottom Layer w0.6: U17.2 102.199,58.273 104.322,56.15 120.761,56.15 X6.1
X7: U18.2 X7.1 | length 31.2
  Bottom Layer w0.6: U18.2 108.077,58.195 109.122,57.15 129.921,57.15 X7.1
pads on no net: SW.1 SW.4 U11.0 U12.0 U13.0 U14.0 U15.0 U16.0 U17.0 U18.0 U100.9 U100.10 U100.11 U100.12 U100.13 U100.14 U100.15 USART.NC

## Polygon pours and split planes (outlines as drawn)
GND on Top Layer "GND" (solid, remove dead copper, pour order 1000): 75.4,113.5 60.4,113.5 49.6,102.7 49.5,102.6 49.5,90.4 49.5,58.9 60.8,47.6 60.9,47.7 79.5,47.7 138.8,47.7 150.6,59.5 150.9,59.8 150.9,69.5 150.9,104 142.9,112 141.4,113.5 75.4,113.5
GND on Bottom Layer "GND" (solid, remove dead copper, pour order 1001): 60.4,113.5 49.5,102.6 49.5,58.9 60.4,48 60.8,47.6 138.8,47.6 138.8,47.7 139.7,48.6 150.9,59.8 150.9,104 141.4,113.5

## Keep-outs
Keep-Out Layer:
  the board outline again, w0.2

## Silkscreen, mask and mechanical layers (free items; w line width, h text height)
Top Overlay:
  lines w0.2: 49.666,90.35 49.71,90.394 52.104,90.394 ; 49.666,90.394 49.666,76.994 52.104,76.994 ; 52.104,91.52 49.692,91.52 49.692,101.52 52.104,101.52 ; 60.532,47.659 60.532,45.46 70.422,45.46 70.532,45.57 70.532,47.659 ; 60.659,113.05 60.659,115.587 70.659,115.587 ; 70.622,115.587 70.659,115.55 70.659,113.25 ; 70.692,47.659 70.692,45.59 70.822,45.46 80.622,45.46 80.692,45.53 80.692,47.659 ; 70.819,113.25 70.819,115.484 70.922,115.587 80.722,115.587 80.819,115.49 80.819,113.25 ; 80.852,47.659 80.852,45.53 80.922,45.46 90.852,45.46 ; 80.979,113.25 80.979,115.444 81.122,115.587 90.979,115.587 90.979,113.25 ; 90.852,45.49 90.852,47.659 ; 91.012,47.659 91.012,45.46 100.922,45.46 101.012,45.55 101.012,47.659 ; 91.139,113.25 91.139,115.587 101.122,115.587 101.139,115.57 101.139,113.25 ; 101.172,47.659 101.172,45.51 101.222,45.46 111.172,45.46 ; 101.299,113.25 101.299,115.587 111.222,115.587 111.299,115.51 111.299,113.25 ; 111.172,45.51 111.172,47.659 ; 111.332,47.659 111.332,45.45 121.332,45.45 ; 111.459,113.25 111.459,115.524 111.522,115.587 121.422,115.587 121.459,115.55 121.459,113.25 ; 121.332,45.56 121.332,47.659 ; 121.492,47.659 121.492,45.45 131.422,45.45 131.492,45.52 131.492,47.659 ; 121.619,113.25 121.619,115.587 131.622,115.587 131.619,115.584 131.619,113.25 ; 131.652,47.659 131.652,45.52 131.722,45.45 141.622,45.45 141.652,45.48 141.652,47.659 ; 131.779,113.25 131.779,115.544 131.822,115.587 141.779,115.587 141.779,113.25 ; 150.715,59.516 153.056,59.516 153.056,69.45 152.99,69.516 150.715,69.516 ; 150.715,69.676 152.982,69.676 153.056,69.75 153.056,79.55 153.056,79.65 153.03,79.676 150.715,79.676 ; 150.715,79.836 153.042,79.836 153.056,79.85 153.056,89.822 153.042,89.836 150.715,89.836 ; 150.715,89.996 153.002,89.996 153.056,90.05 153.056,99.95 153.01,99.996 150.715,99.996
  text "GND" at 64.422,114.95 h1.1 r180
  text "GND" at 74.436,114.95 h1.1 r180
  text "GND" at 84.651,114.95 h1.1 r180
  text "GND" at 94.865,114.95 h1.1 r180
  text "GND" at 105.079,114.95 h1.1 r180
  text "GND" at 115.293,114.95 h1.1 r180
  text "GND" at 125.508,114.95 h1.1 r180
  text "GND" at 135.722,114.95 h1.1 r180
  text "24V" at 50.322,100.15 h1.1 r270
  text "VCC" at 104.5,96.4 h0.8
  text "GND" at 112.5,96.4 h0.8
  text "GND" at 50.322,95.35 h1.1 r270
  text "P0.5" at 112.7,93.9 h0.8
  text "P0.7" at 103.8,93.7 h0.8
  text "P0.4" at 112.7,91.2 h0.8
  text "P0.6" at 103.8,91.1 h0.8
  text "5V" at 50.422,88.95 h1.1 r270
  text "NC" at 50.322,84.65 h1.1 r270
  text "24V" at 50.322,80.75 h1.1 r270
  text "P4.3" at 100.6,72.4 h0.8
  text "P2.1" at 109.4,72.2 h0.8
  text "P4.2" at 100.6,69.9 h0.8
  text "P2.0" at 109.4,69.7 h0.8
  text "P2.4" at 116.2,58.7 h0.6
  text "P2.5" at 119.1,58.7 h0.6
  text "P2.6" at 121.8,58.7 h0.6
  text "GND" at 124.5,58.7 h0.6
  text "GND" at 126.9,58.7 h0.6
  text "VCC" at 129.4,58.7 h0.6
  text "VCC" at 131.9,58.7 h0.6
  text "GND" at 66.322,45.95 h1.1
  text "GND" at 76.536,45.95 h1.1
  text "GND" at 86.751,45.95 h1.1
  text "GND" at 96.965,45.95 h1.1
  text "GND" at 107.179,45.95 h1.1
  text "GND" at 117.393,45.95 h1.1
  text "GND" at 127.608,45.95 h1.1
  text "GND" at 137.822,45.95 h1.1
Mechanical 1:
  the board outline again, w0.2

## Dimensions
53.522,111.95 to 53.522,48.95 on Top Overlay
53.522,111.95 to 149.522,111.95 on Top Overlay
49.022,116.45 to 49.022,44.45 on Top Overlay
49.022,116.45 to 154.022,116.45 on Top Overlay

## Text inside footprints (layer, text, board x,y; h text height)
USART: Top Overlay "USB2.0_A" at 58.262,70.894 h1 r270